# Altium PCB 远程医疗完成2014-11-06.PcbDoc
Units mm, origin at the board's own origin, x right, y up, seen from the top; angles counter-clockwise.
Board outline 50.04 x 93.47 mm, 4 copper layers (Top Layer, Internal Plane 1, Internal Plane 2, Bottom Layer); 67 components, 68 nets, 297 pads, 72 vias.
Unrouted connection lines stored in the file: 1.
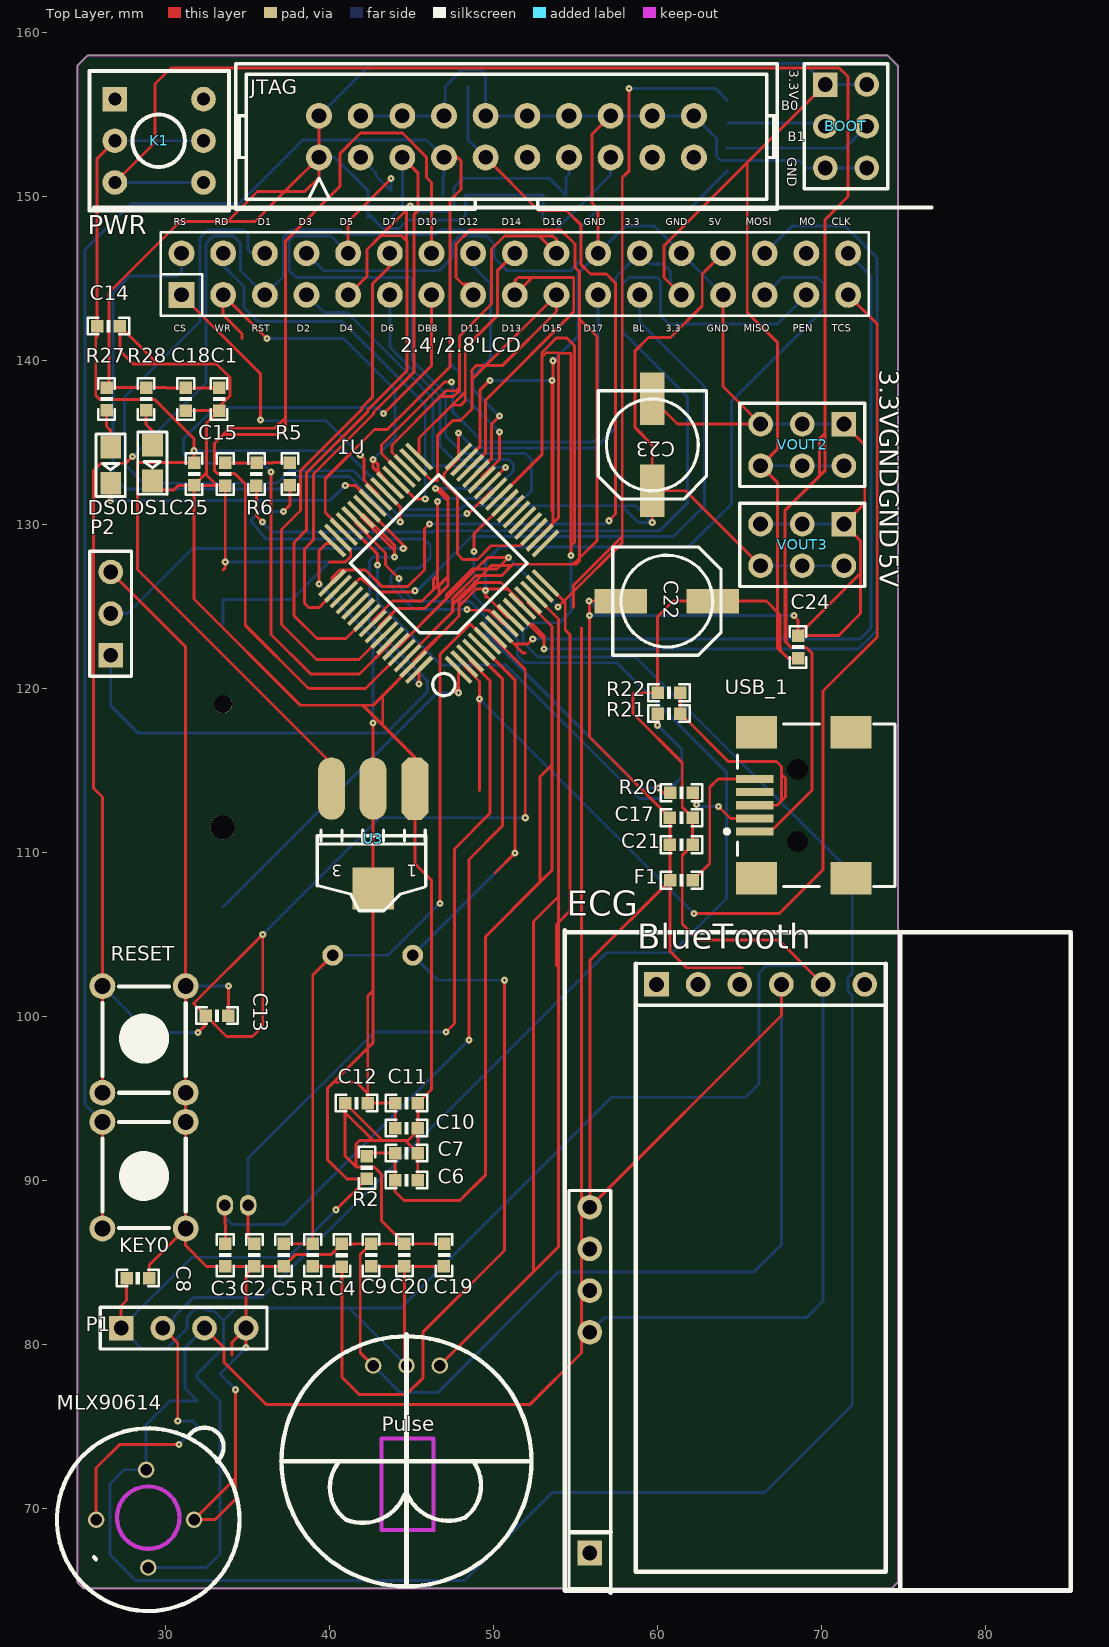
[diagram p0: Top Layer view]
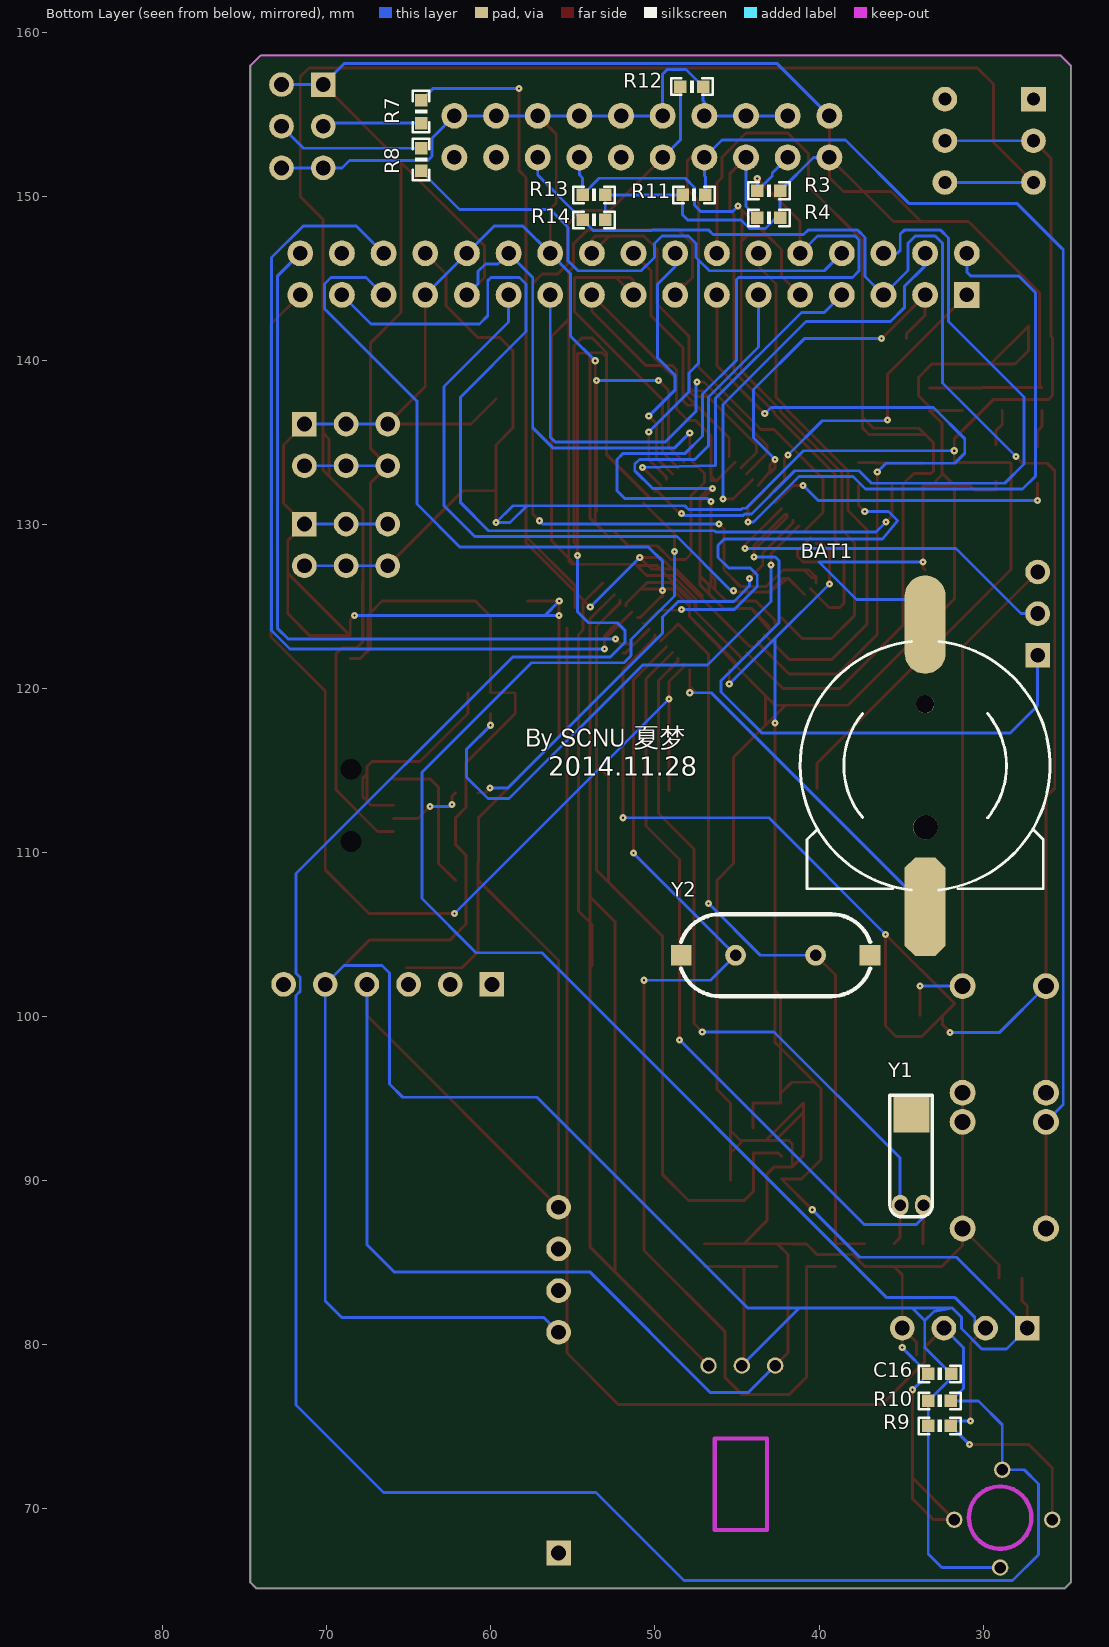
[diagram p1: Bottom Layer view, seen from below]
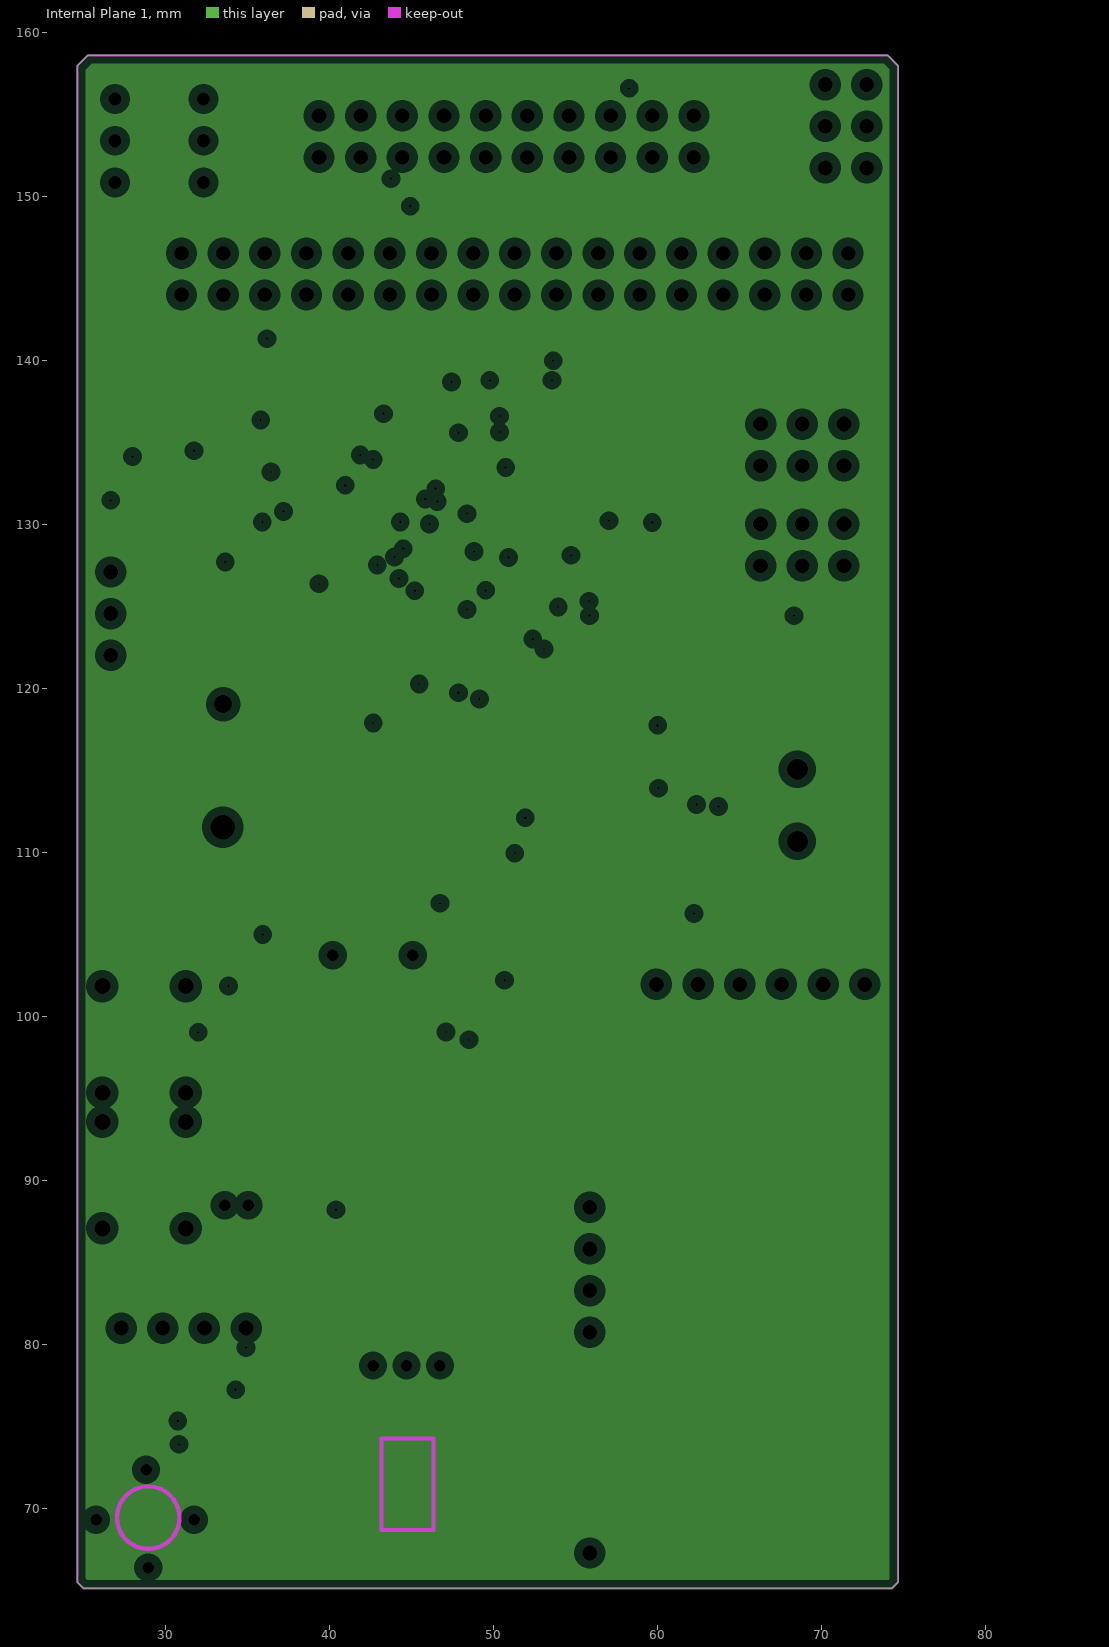
[diagram p2: Internal Plane 1, clearances drawn from the general rule]
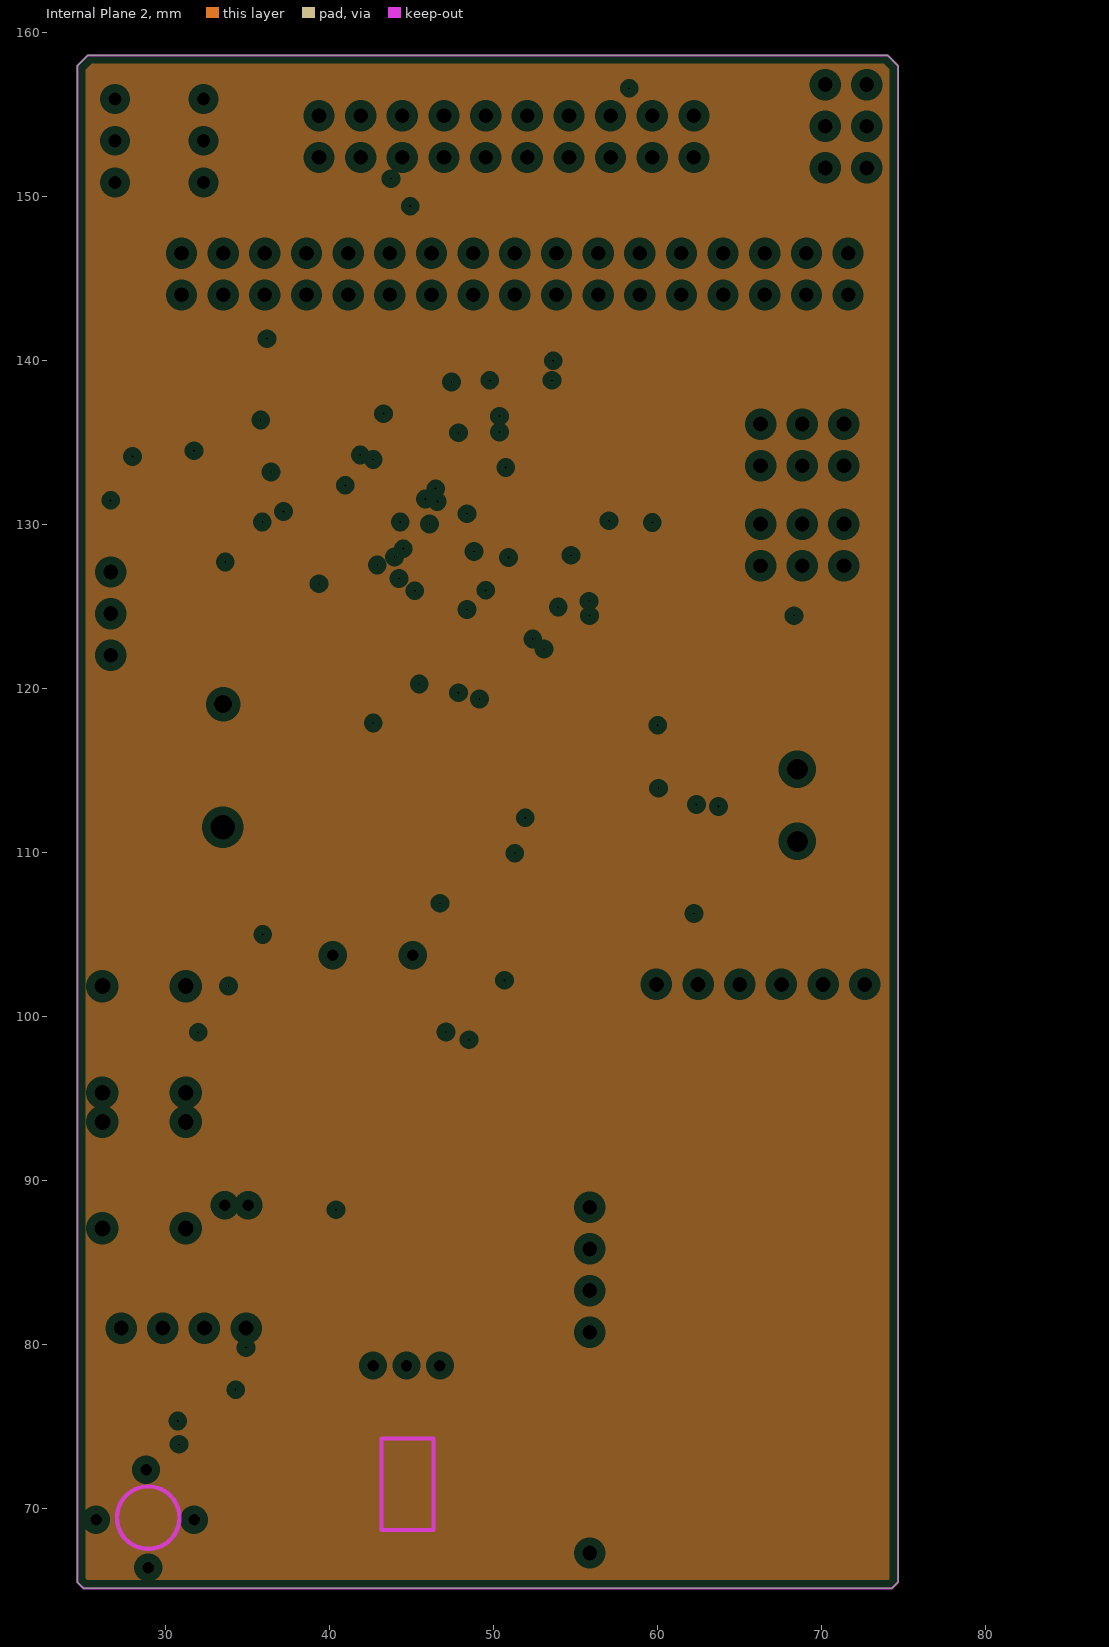
[diagram p3: Internal Plane 2, clearances drawn from the general rule]

## Layer stack, top to bottom
Top Layer: signal copper 0.0356
Dielectric: dielectric 0.32, FR-4, Dk 4.8
Internal Plane 1: plane copper 0.0356
Dielectric: dielectric 0.32, FR-4, Dk 4.8
Internal Plane 2: plane copper 0.0356
Dielectric: dielectric 0.32, FR-4, Dk 4.8
Bottom Layer: signal copper 0.0356

## Board outline
25.019,65.151 24.638,65.532 24.638,157.988 25.273,158.623 74.041,158.623 74.676,157.988 74.676,65.532 74.295,65.151

## Design rules (kind name [scope] priority, off if disabled: settings)
Clearance [All] p1: gap=0.178
HoleSize [All] p1: absolutevalues=TRUE maxlimit=6.3 minlimit=0.3 maxpercent=80.000 minpercent=20.000
HoleToHoleClearance [All] p1 off: gap=0.254 allowstackedmicrovias=FALSE
LayerPairs [All] p1 off: enforce=TRUE
MinimumSolderMaskSliver [All] p1 off: minsoldermaskwidth=0.254
NetAntennae [All] p1 off: netantennaetolerance=0
PlaneClearance [All] p1: clearance=0.508
PlaneConnect [All] p1: planeconnectstyle=Relief reliefexpansion=0.508 reliefentries=4 reliefconductorwidth=0.254 reliefairgap=0.254
PolygonConnect [All] p1: connectstyle=Relief reliefconductorwidth=0.254 reliefentries=4 polygonreliefangle="90 Angle" airgapwidth=0.254
RoomDefinition 远程医疗 [InComponentClass('远程医疗')] p1: confinementstyle=ConfineIn formatcopy=TRUE lockcomponents=FALSE outline 0,0 50.8,0 50.8,25.4 0,25.4
RoutingVias [All] p1: holewidth=0.127 width=0.432 viastyle="Through Hole" minholewidth=0.127 minwidth=0.432 maxholewidth=0.127 maxwidth=0.432
SilkToSilkClearance [All] p1 off: silktosilkclearance=0.1
SilkToSolderMaskClearance [IsPad] p1 off: minsilkscreentomaskgap=0.1 clearancetoexposedcopper=TRUE
SolderMaskExpansion [All] p1: expansion=0.102
Width [All] p1: maxlimit=0.178 minlimit=0.178 preferedwidth=0.178
19 further rules are at their usual default settings.

## Components (designator, comment, footprint, x,y, rotation, side; value= is the part's Value field where it differs from the comment)
2.4'/2.8'LCD "TFT_LCD" DB2*17 56.388,118.618 r0 top
BAT1 "BATT" BATM 33.528,115.316 r180 bottom
BlueTooth "BlueTooth" BlueTooth 59.944,101.981 r0 top
BOOT "VCC5" HDR2X3 70.231,156.845 r270 top
C1 "104" 0603P#1 33.274,137.668 r270 top
C2 "22pF" 0603P#1 35.433,85.471 r90 top
C3 "22pF" 0603P#1 33.655,85.471 r90 top
C4 "22pF" 0603P#1 40.767,85.471 r270 top
C5 "22pF" 0603P#1 37.211,85.471 r90 top
C6 "104" 0603P#1 44.704,90.043 r180 top
C7 "10u" 0603P#1 44.704,91.694 r180 top
C8 "104" 0603P#1 28.321,84.074 r0 top
C9 "104" 0603P#1 42.545,85.471 r90 top
C10 "104" 0603P#1 44.704,93.218 r0 top
C11 "104" 0603P#1 44.704,94.742 r0 top
C12 "104" 0603P#1 41.656,94.742 r180 top
C13 "104" 0603P#1 33.147,100.076 r0 top
C14 "104" 0603P#1 26.543,142.113 r180 top
C15 "22pF" 0603P#1 33.655,133.096 r270 top
C16 "100nF" 0603P#1 32.639,78.232 r180 bottom
C17 "104" 0603P#1 61.468,112.141 r180 top
C18 "104" 0603P#2 31.242,137.668 r270 top
C19 "104" 0603P#1 46.99,85.471 r90 top
C20 "104" 0603P#1 44.577,85.471 r90 top
C21 "10u" 0603P#1 61.468,110.49 r180 top
C22 "220uF" CC6.56.5 60.579,125.349 r180 top
C23 "220uF" CC6.56.5 59.69,134.874 r90 top
C24 "104" 0603P#1 68.58,122.555 r270 top
C25 "104" 0603P#1 31.75,133.096 r90 top
DS0 "LED0" SMDLED 26.67,134.747 r270 top
DS1 "PWR" SMDLED 29.21,134.874 r270 top
ECG "ECG" ECG 83.947,102.997 r270 top
F1 "500mA" 0603P#1 61.468,108.331 r0 top
JTAG "JTAG" JTAG_20 50.8,153.67 r0 top
K1 "BUTTON" BTN8.5*8.5 26.924,155.956 r0 top
KEY0 "KEY_M" KEY_M 31.242,93.599 r270 top
MLX90614 "MLX90614" MLX90614 28.829,72.39 r90 top
P1 "Header 4" HDR1X4 27.305,81.026 r0 top
P2 "Header 3" HDR1X3 26.67,122.047 r90 top
Pulse "Pulse" Pulse 46.736,78.74 r180 top
R1 "1M" 0603P#1 38.989,85.471 r90 top
R2 "10R" 0603P#1 42.291,90.805 r90 top
R3 "10K" 0603P#1 43.053,150.368 r0 bottom
R4 "10K" 0603P#1 43.053,148.717 r0 bottom
R5 "4.7K" 0603P#1 37.592,133.096 r90 top
R6 "10R" 0603P#1 35.56,133.096 r270 top
R7 "100K" 0603P#1 64.262,155.194 r270 bottom
R8 "100K" 0603P#1 64.262,152.273 r270 bottom
R9 "4.7K" 0603P#1 32.639,75.057 r0 bottom
R10 "4.7K" 0603P#1 32.639,76.581 r0 bottom
R11 "10K" 0603P#1 47.625,150.114 r180 bottom
R12 "10K" 0603P#1 47.752,156.718 r0 bottom
R13 "10K" 0603P#1 53.721,150.114 r0 bottom
R14 "10K" 0603P#1 53.721,148.59 r0 bottom
R20 "22R" 0603P#1 61.468,113.665 r0 top
R21 "22R" 0603P#1 60.706,118.491 r0 top
R22 "1.5K" 0603P#1 60.706,119.761 r0 top
R27 "510" 0603P#1 26.416,137.668 r90 top
R28 "510" 0603P#1 28.829,137.668 r90 top
RESET "KEY_M" KEY_M 26.162,95.377 r90 top
U1 "STM32F103RBT6" STM32F103RXT 47.879,121.158 r135 top
U3 "AMS1117-3.3" AMS1117 45.212,113.919 r180 top
USB_1 "USB" USB/SM0.8-6H5 73.787,112.903 r0 top
VOUT2 "VCC3.3" HDR2X3 71.374,136.144 r180 top
VOUT3 "VCC5" HDR2X3 71.374,130.048 r180 top
Y1 "32.768MHz" "XTAL 32M" 35.052,88.519 r90 bottom
Y2 "8MHz" XTAL_US 45.085,103.759 r180 bottom

## Footprints (in the part's own frame and the unit in brackets; to place one, negate y for a bottom-side part, rotate by r counter-clockwise, add the part's x,y. Pads: shape width x height; smd on the part's side, far side on the other; paste and mask are expansions set on the pad)
0603P#1 [mil]
  rect 30x30 smd: 1(-27,0) 2(27.5,-0.06)
  silkscreen extent -50,-20 50,20
0603P#2 [mil]
  rect 30x30 smd: 1(-27,0) 2(27.5,0.06)
  silkscreen extent -50,-20 50,20
AMS1117 [mil]
  oct 65x150 smd: 1(0.03,-0.06)
  oval 65x150 smd: 2(100.03,-0.06) 3(200.03,-0.06)
  rect 100x100 smd: 4(100.03,239.94)
  silkscreen extent -26,100 234,293
BATM [mm]
  round 1.1 hole 1.1 unplated: 0(0,3.748)
  round 1.5 hole 1.5 unplated: 0(0.025,-3.752)
  oct 2.5x6 smd: 1(0,-8.602)
  oval 2.5x6 smd: 2(0,8.598)
  silkscreen extent -7.62,-7.58 7.62,7.57
BlueTooth [mm]
  rect 1.5x1.5 hole 0.9: 1(0,0)
  round 1.5 hole 0.9: 2(2.54,0) 3(5.08,0) 4(7.62,0) 5(10.16,0) 6(12.7,0)
  silkscreen extent -1.27,-35.81 13.97,1.27
BTN8.5*8.5 [mm]
  rect 1.5x1.5 hole 0.8: 1(0,0)
  round 1.5 hole 0.8: 2(0,-2.54) 3(0,-5.08) 4(5.4,-5.08) 5(5.4,-2.54) 6(5.4,0)
  silkscreen extent -1.55,-6.79 6.95,1.71
CC6.56.5 [mm]
  rect 3.2x1.5 smd: 1(-2.794,0) 2(2.8,0)
  silkscreen extent -3.3,-3.3 3.3,3.3
DB2*17 [mil]
  rect 62x62 hole 35: 1(-1000,1000)
  round 62 hole 35: 2(-1000,1100) 3(-900,1000) 4(-900,1100) 5(-800,1000) 6(-800,1100) 7(-700,1000) 8(-700,1100) 9(-600,1000) 10(-600,1100) 11(-500,1000) 12(-500,1100) 13(-400,1000) 14(-400,1100) 15(-300,1000) 16(-300,1100) 17(-200,1000) 18(-200,1100) 19(-100,1000) 20(-100,1100) 21(0,1000) 22(0,1100) 23(100,1000) 24(100,1100) 25(200,1000) 26(200,1100) 27(300,1000) 28(300,1100) 29(400,1000) 30(400,1100) 31(500,1000) 32(500,1100) 33(600,1000) 34(600,1100)
  round 133.86 on Top Overlay: ""(-1080,-1935) ""(675,-1935)
  silkscreen extent -1210,-2035 800,1210
ECG [mm]
  rect 1.5x1.5 hole 0.9: 1(35.687,-28.067)
  round 1.5 hole 0.9: 2(22.225,-28.067) 3(19.685,-28.067) 4(17.145,-28.067) 5(14.605,-28.067)
  silkscreen extent -2.29,-29.59 38.1,1.27
HDR1X3 [mm] "Connector; Header; 3 Position"
  rect 1.5x1.5 hole 0.9: 1(0,0)
  round 1.5 hole 0.9: 2(2.54,0) 3(5.08,0)
  silkscreen extent -1.27,-1.27 6.35,1.27
HDR1X4 [mm] "Connector; Header; 4 Position"
  rect 1.5x1.5 hole 0.9: 1(0,0)
  round 1.5 hole 0.9: 2(2.54,0) 3(5.08,0) 4(7.62,0)
  silkscreen extent -1.27,-1.27 8.89,1.27
HDR2X3 [mm]
  rect 1.5x1.5 hole 0.9: 1(0,0)
  round 1.5 hole 0.9: 2(0,2.54) 3(2.54,0) 4(2.54,2.54) 5(5.08,0) 6(5.08,2.54)
  silkscreen extent -1.27,-1.27 6.35,3.81
JTAG_20 [mil]
  round 62 hole 35: 1(-450,-50) 2(-450,50) 3(-350,-50) 4(-350,50) 5(-250,-50) 6(-250,50) 7(-150,-50) 8(-150,50) 9(-50,-50) 10(-50,50) 11(50,-50) 12(50,50) 13(150,-50) 14(150,50) 15(250,-50) 16(250,50) 17(350,-50) 18(350,50) 19(450,-50) 20(450,50)
  silkscreen extent -650,-175 650,175
KEY_M [mil]
  round 62 hole 38: 1(0,0) 1(255.91,0) 2(0,-200) 2(255.91,-200)
  silkscreen extent 0,-200 255,0
MLX90614 [mm]
  round 1 hole 0.7: 1(0,0) 2(-3.048,3.048) 3(-5.969,-0.127) 4(-3.048,-2.921)
  silkscreen extent -8.62,-5.7 2.56,5.44
Pulse [mm]
  round 1 hole 0.7: 1(0,0) 2(2.032,0) 3(4.064,0)
  silkscreen extent -5.59,-1.9 9.65,13.46
SMDLED [mm]
  rect 1.4x1.27 smd: 1(0.001,-0.002) 2(2.211,-0.002)
  silkscreen extent -0.8,-0.89 3.01,0.89
STM32F103RXT [mm]
  rect 2.2x0.254 smd: 1(0,0) 2(0,-0.5) 3(0,-1) 4(0,-1.5) 5(0,-2) 6(0,-2.5) 7(0,-3) 8(0,-3.5) 9(0,-4) 10(0,-4.5) 11(0,-5) 12(0,-5.5) 13(0,-6) 14(0,-6.5) 15(0,-7) 16(0,-7.5) 33(10.9,-7.5) 34(10.9,-7) 35(10.9,-6.5) 36(10.9,-6) 37(10.9,-5.5) 38(10.9,-5) 39(10.9,-4.5) 40(10.9,-4) 41(10.9,-3.5) 42(10.9,-3) 43(10.9,-2.5) 44(10.9,-2) 45(10.9,-1.5) 46(10.9,-1) 47(10.9,-0.5) 48(10.9,0)
  rect 0.254x2.2 smd: 17(1.7,-9.2) 18(2.2,-9.2) 19(2.7,-9.2) 20(3.2,-9.2) 21(3.7,-9.2) 22(4.2,-9.2) 23(4.7,-9.2) 24(5.2,-9.2) 25(5.7,-9.2) 26(6.2,-9.2) 27(6.7,-9.2) 28(7.2,-9.2) 29(7.7,-9.2) 30(8.2,-9.2) 31(8.7,-9.2) 32(9.2,-9.2) 49(9.2,1.7) 50(8.7,1.7) 51(8.2,1.7) 52(7.7,1.7) 53(7.2,1.7) 54(6.7,1.7) 55(6.2,1.7) 56(5.7,1.7) 57(5.2,1.7) 58(4.7,1.7) 59(4.2,1.7) 60(3.7,1.7) 61(3.2,1.7) 62(2.7,1.7) 63(2.2,1.7) 64(1.7,1.7)
  silkscreen extent -0.68,-7.56 9.26,1.95
USB/SM0.8-6H5 [mm]
  rect 2.3x0.5 smd: 1(-7.85,-1.6) 2(-7.85,-0.8) 3(-7.85,0) 4(-7.85,0.8) 5(-7.85,1.6)
  rect 2.5x2 smd: 6(-7.75,4.45) 7(-1.996,4.45) 8(-7.75,-4.45) 9(-1.996,-4.45)
  round 0.6 hole 1.27 unplated: MH1(-5.25,2.2) MH2(-5.25,-2.2)
  silkscreen extent -9.67,-4.95 0.7,4.95
"XTAL 32M" [mil]
  oval 50x40 hole 28: 1(0,0) 2(0,-56)
  rect 92.13x86 smd: ""(220,-27)
  silkscreen extent -28,-77 264,25
XTAL_US [mil]
  round 50 hole 28: 1(0,0) 2(192.13,0)
  rect 50x50 smd: ""(-130.32,0) ""(322.44,0)
  silkscreen extent -131,-98 323,98

## Part data
BAT1: library part BAT
BOOT VOUT2 VOUT3: library part "Header 3X2", "Header, 3-Pin, Dual row"
C1 C2 C3 C4 C5 C6 C7 C8 C9 C10 C11 C12 C13 C14 C15 C16 C17 C18 C19 C20 C21 C24 C25: library part C
C22 C23: library part CAP
DS0 DS1: library part LED2, "Typical RED, GREEN, YELLOW, AMBER GaAs LED"
F1 R1 R2 R3 R4 R5 R6 R7 R8 R9 R10 R11 R12 R13 R14 R20 R21 R22 R27 R28: library part R
P1: "Header, 4-Pin"
P2: "Header, 3-Pin"
U3: library part AMS1117
USB_1: library part USB5
Y1 Y2: library part XTAL, "Crystal Oscillator"

## Via types
v1: diameter 0.432, hole 0.127, Top Layer to Bottom Layer, 72 vias

## Nets (pads, with @x,y where several pads share a name; then routed paths per layer and width w, separated by ;. In a path a pad name is that pad's centre, name@x,y a point inside that pad or via, vN(x,y) a via of type N, cw(c..) or ccw(c..) an arc to the next point about the centre after c; other vN are vias at no path point)
BOOT0: R7.1 U1.60 | length 63.6
  Top Layer w0.178: U1.60 44.211,122.572 47.13,125.491 ; v1(53.95,124.993) 54.889,125.933 ; 54.864,124.968 54.889,124.993 54.889,125.933 ; v1(58.28,156.616) 58.28,151.589 57.861,151.17 57.861,129.286 ; 47.13,125.491 47.13,125.722 48.711,127.303 48.942,127.303 ; 47.13,125.491 48.942,127.303 ; 48.942,127.303 49.655,128.016 v1(50.927,128.016) 50.214,127.303 48.942,127.303 ; 54.889,125.933 57.861,128.905 57.861,129.286 ; 54.889,125.933 54.889,126.314 57.861,129.286
  Bottom Layer w0.178: v1(50.927,128.016) v1(53.95,124.993) ; v1(58.28,156.616) 63.525,156.616 R7.1
BOOT1: 2.4'/2.8'LCD.8 R8.2 U1.28 | length 47.7
  Top Layer w0.178: U1.28 49.293,132.905 50.379,133.991 v1(50.379,135.661)
  Bottom Layer w0.178: 2.4'/2.8'LCD.8 39.675,145.491 46.685,145.491 47.346,146.152 ; v1(50.379,135.661) 47.93,138.11 47.93,139.266 47.346,139.85 47.346,146.152 ; R8.2 61.914,149.225 56.388,149.225 55.296,148.133 55.296,146.101 54.686,145.491 50.851,145.491 50.038,146.304 50.038,147.155 49.581,147.612 47.955,147.612 47.498,147.155 47.498,146.304 47.346,146.152
"BT RXD": P2.2 U1.42 | length 23.1
  Top Layer w0.178: U1.42 44.504,128.775 ; v1(44.504,128.549) 44.504,128.775 ; v1@44.702,128.549 44.702,128.578 44.504,128.775
  Bottom Layer w0.178: P2.2 27.686,124.587 31.648,128.549 v1(44.504,128.549)
"BT TXD": P2.1 U1.43 | length 41.7
  Top Layer w0.178: v1(43.967,128.041) 43.967,128.067 43.967,128.455 ; 43.967,128.455 41.939,130.483 U1.43 42.09,130.633 43.967,128.755 43.967,128.455
  Bottom Layer w0.178: P2.1 26.67,118.974 28.346,117.297 43.459,117.297 45.974,119.812 45.974,120.498 42.443,124.028 42.443,127.813 42.672,128.041 v1(43.967,128.041)
ECG: U1.16 | length 24.3
  Top Layer w0.178: U1.16 54.381,125.262 54.381,123.596 54.661,123.317 54.661,106.451 53.848,105.639 53.848,103.124
GND: 2.4'/2.8'LCD.22 2.4'/2.8'LCD.26 2.4'/2.8'LCD.27 BAT1.2 BlueTooth.4 BOOT.5 BOOT.6 C1.2 C2.1 C3.1 C4.1 C5.1 C6.1 C7.1 C8.2 C9.2 C10.2 C11.2 C12.2 C13.2 C14.1 C15.2 C16.1 C17.2 C18.2 C19.2 C20.2 C21.2 C22.2 C23.2 C24.1 C25.1 DS1.2 ECG.5 F1.1 JTAG.4 JTAG.6 JTAG.8 JTAG.10 JTAG.12 JTAG.14 JTAG.16 JTAG.18 JTAG.20 KEY0.1 MLX90614.4 P1.4 P2.3 Pulse.3 R12.1 RESET.2 U1.12 U1.18 U1.31 U1.47 U1.63 U3.1 VOUT2.1 VOUT2.3 VOUT2.5 VOUT3.1 VOUT3.3 VOUT3.5 | length 532.9
  Top Layer w0.178: P2.3 31.242,122.555 31.242,101.877 31.242,95.377 31.242,93.599 KEY0.1@31.242,87.099 ; C8.2 29.019,84.876 KEY0.1@31.242,87.099 ; DS1.2 29.208,132.119 30.516,132.119 30.807,132.41 C25.1 ; C18.2 C1.2@33.033,136.969 ; 33.528,127.257 33.653,127.383 v1(33.653,127.731) C15.2 33.147,132.398 ; C13.2 v1(33.846,101.877) ; 34.061,79.375 34.061,80.162 P1.4 ; v1(34.29,77.267) 34.29,71.882 ; v1(34.925,79.832) P1.4 ; 40,127.731 40.97,127.731 41.306,128.067 41.306,128.438 U1.47 ; Pulse.3 41.885,79.527 41.885,85.507 C9.2 ; U1.63@45.121,121.361 U1.63@45.121,121.448 ; C6.1 C7.1 ; C19.2 C20.2 ; U1.31 49.174,134.757 49.174,138.201 v1(49.784,138.811) ; U1.12 51.768,125.197 50.88,126.086 ; U1.18 52.829,129.283 53.645,130.099 ; v1(53.569,138.811) 53.569,130.835 53.645,130.759 ; v1(53.645,140.005) 53.645,130.759 ; 53.975,140.335 53.975,130.429 53.645,130.099 ; 2.4'/2.8'LCD.22 56.388,149.25 56.02,149.619 56.02,153.81 JTAG.16 ; C22.2 v1(55.836,125.349) 55.855,125.33 v1(55.855,124.46) 55.855,117.058 C17.2 C21.2 60.77,109.41 60.782,109.398 F1.1 ; C23.2 61.22,136.144 VOUT2.5 64.008,138.43 2.4'/2.8'LCD.27 ; 65.151,102.997 61.773,102.997 60.782,103.988 F1.1 ; BlueTooth.4 67.564,100.076 ECG.5 55.88,103.429 F1.1 ; v1(68.326,124.46) 68.58,124.206 C24.1 ; VOUT2.1 72.644,134.874 72.644,131.318 VOUT3.1 72.391,129.031 72.391,127.052 ; 29.54,139.802 33.122,139.802 33.934,138.989 33.934,137.871 C1.2@33.033,136.969 ; 29.54,139.802 C14.1 27.229,140.614 28.042,139.802 29.54,139.802 ; KEY0.1@31.242,87.099 31.242,86.055 32.512,84.785 C3.1 C2.1 ; C25.1 32.703,132.398 33.147,132.398 ; C25.1 31.75,125.476 38.227,118.999 42.037,118.999 ; C25.1 32.512,133.172 ; 32.512,133.172 32.512,133.032 33.147,132.398 ; 32.512,133.172 32.512,136.209 C1.2 C1.2@33.033,136.969 ; 34.29,71.882 MLX90614.4 33.02,69.342 34.29,70.612 34.29,71.882 ; P1.4 34.925,84.277 C2.1 ; C2.1 C5.1 37.948,85.522 40.132,85.522 C4.1 41.631,86.157 41.643,86.169 C9.2 ; 40.957,94.17 42.672,92.456 ; 40.957,94.17 40.957,91.529 41.631,90.856 ; 40.957,94.17 C12.2 43.245,92.456 ; 41.631,90.856 42.723,90.856 43.18,90.399 43.18,87.568 C20.2 ; 41.631,90.856 41.631,92.253 41.834,92.456 42.672,92.456 ; 42.037,118.999 42.672,118.999 43.257,119.584 ; 42.037,118.999 43.257,117.779 ; C9.2 C20.2 ; 42.672,92.456 43.245,92.456 ; 43.245,92.456 44.628,92.456 ; 43.257,117.779 43.257,119.584 ; 43.257,117.779 45.211,115.825 U3.1 45.211,109.347 46.228,108.33 46.228,95.566 C11.2 C10.2 C10.2@45.402,93.066 ; 43.257,119.584 U1.63@45.121,121.448 ; 44.628,92.456 C7.1 ; 44.628,92.456 44.793,92.456 C10.2@45.402,93.066 ; U1.63@45.121,121.448 U1.63 ; U1.63 45.121,121.662 47.904,124.445 ; U1.63 47.904,124.445 ; C7.1 45.39,92.431 45.402,92.443 ; C7.1 45.402,92.443 ; 45.402,92.443 C10.2@45.402,93.066 ; 47.904,124.445 47.904,125.041 ; 47.904,125.041 48.949,126.086 50.88,126.086 ; 47.904,125.041 47.904,125.349 49.047,126.492 50.473,126.492 50.88,126.086 ; 53.645,130.099 53.645,130.759 ; C24.1 71.044,123.241 72.391,124.588 72.391,127.052 ; C24.1 72.391,127.052
  Bottom Layer w0.178: RESET.2@31.242,101.877 v1(33.846,101.877) ; BAT1.2 33.528,125.451 37.719,125.451 40,127.731 v1(33.653,127.731) ; v1(34.29,77.267) C16.1 v1(34.925,79.832) ; JTAG.4 JTAG.6 JTAG.8 46.99,155.778 47.066,155.854 R12.1 48.108,157.759 49.251,157.759 49.53,157.48 JTAG.10 JTAG.12 JTAG.14 JTAG.16 JTAG.18 JTAG.20 63.602,153.568 63.602,152.476 63.856,152.222 68.631,152.222 69.088,151.765 BOOT.5 BOOT.6 ; Pulse.3 44.323,77.089 46.609,77.089 53.975,84.455 65.913,84.455 67.564,86.106 BlueTooth.4 ; v1(49.784,138.811) v1(53.569,138.811) ; v1(53.645,140.005) 55.143,141.503 55.143,145.313 2.4'/2.8'LCD.22 58.039,148.209 59.817,148.209 2.4'/2.8'LCD.26 2.4'/2.8'LCD.27 ; v1(55.836,125.349) 56.725,124.46 ; v1(55.855,124.46) 56.725,124.46 ; VOUT3.5 VOUT3.3 VOUT3.1 ; VOUT2.5 VOUT2.3 VOUT2.1 ; v1(68.326,124.46) 56.725,124.46
JTCK: JTAG.9 R12.2 U1.49 | length 53.8
  Top Layer w0.178: U1.49 40.172,126.797 ; v1(46.101,130.048) 45.796,129.743 45.796,127.251 44.797,126.251 43.192,126.251 42.201,127.242 U1.49@40.907,127.242 ; JTAG.9 52.756,149.174 54.458,149.174 55.334,148.298 55.334,145.885 55.931,145.288 56.896,145.288 57.455,144.729 57.455,130.658 v1(57.048,130.251) ; 40.172,126.797 40.617,127.242 U1.49@40.907,127.242 ; 40.172,126.797 40.462,126.797 U1.49@40.907,127.242
  Bottom Layer w0.178: v1(46.101,130.048) 56.845,130.048 v1(57.048,130.251) ; R12.2 48.45,153.48 JTAG.9
JTDI: JTAG.5 R4.2 U1.50 | length 37
  Top Layer w0.178: U1.50 39.385,124.968 38.735,124.968 38.478,125.225 38.478,128.535 39.037,129.094 39.037,133.093 42.697,136.753 42.697,136.852 45.174,139.328 45.174,148.934 45.415,149.175 45.415,151.435 JTAG.5
  Bottom Layer w0.178: R4.2 44.45,149.417 JTAG.5
JTDO: 2.4'/2.8'LCD.9 JTAG.13 R13.2 U1.55 | length 55.7
  Top Layer w0.178: 2.4'/2.8'LCD.9 42.291,145.161 42.291,146.787 43.129,147.625 ; U1.55 41.016,123.063 39.243,123.063 37.846,124.46 37.846,128.93 38.595,129.68 38.595,133.154 42.342,136.901 42.342,136.999 44.742,139.399 44.742,147.282 44.704,147.32 ; v1(44.933,149.428) 44.704,149.2 ; 43.129,147.625 44.399,147.625 44.704,147.32 ; 43.129,147.625 44.704,149.2 ; 44.704,147.32 44.704,149.2
  Bottom Layer w0.178: v1(44.933,149.428) 45.263,149.098 47.208,149.098 47.6,149.49 47.6,150.571 48.158,151.13 53.405,151.13 R13.2 54.419,151.155 54.61,151.346 JTAG.13
JTMS: JTAG.7 KEY0.2 R11.2 U1.46 | length 115.6
  Top Layer w0.178: KEY0.2@26.162,87.099 KEY0.2@26.162,93.599 ; U1.46 40.879,129.632 39.751,130.759 39.751,132.811 42.746,135.806 43.528,135.806 47.346,139.624 47.346,149.758 48.031,150.444 48.031,152.197 47.828,152.4 JTAG.7
  Bottom Layer w0.178: KEY0.2@26.162,93.599 25.108,94.653 25.108,146.774 27.915,149.581 34.493,149.581 38.379,153.467 45.923,153.467 JTAG.7 46.99,151.27 46.926,151.206 R11.2
JTRST: 2.4'/2.8'LCD.10 JTAG.3 R3.2 U1.56 | length 58.3
  Top Layer w0.178: 2.4'/2.8'LCD.10 41.148,148.488 v1(43.764,151.105) ; v1(46.584,131.42) 46.584,126.914 ; U1.56@42.687,124.177 42.687,123.986 U1.56 42.646,124.137 U1.56@42.687,124.177 ; U1.56@42.687,124.177 43.859,125.349 45.658,125.349 46.34,126.031 ; 46.34,126.031 46.34,126.67 46.584,126.914 ; 46.34,126.031 46.584,126.275 46.584,126.914
  Bottom Layer w0.178: 2.4'/2.8'LCD.10 40.094,147.612 37.795,147.612 37.554,147.371 37.554,145.491 37.96,145.085 44.907,145.085 45.034,144.958 45.034,140.036 47.099,137.971 47.099,135.425 48.184,134.341 51.968,134.341 52.324,133.985 52.324,132.08 51.841,131.597 46.761,131.597 v1(46.584,131.42) ; JTAG.3 42.85,151.46 42.85,151.271 R3.2 43.752,151.092 v1(43.764,151.105)
"LCD BL": 2.4'/2.8'LCD.23 U1.51 | length 40.9
  Top Layer w0.178: U1.51 41.87,126.746 ; v1(45.212,125.984) 45.123,125.895 43.045,125.895 ; 41.87,126.746 42.194,126.746 43.045,125.895 ; 41.87,126.746 43.045,125.895
  Bottom Layer w0.178: v1(45.212,125.984) 45.364,125.984 48.666,129.286 60.985,129.286 62.865,131.166 62.865,138.43 58.928,142.367 2.4'/2.8'LCD.23
"LCD CS": 2.4'/2.8'LCD.1 U1.40 | length 19.6
  Top Layer w0.178: 2.4'/2.8'LCD.1 35.814,139.192 v1(35.814,136.398) ; v1(41.886,134.263) 42.115,134.034 42.115,132.729 43,131.844 U1.40
  Bottom Layer w0.178: v1(35.814,136.398) 35.865,136.347 39.802,136.347 v1(41.886,134.263)
"LCD D0": 2.4'/2.8'LCD.6 U1.26 | length 46
  Top Layer w0.178: v1(48.387,130.683) 48.486,130.683 49.85,132.047 U1.26
  Bottom Layer w0.178: 2.4'/2.8'LCD.6 35.23,146.558 35.047,146.741 35.047,147.726 34.806,147.968 32.581,147.968 32.106,147.493 32.106,142.392 27.508,137.795 27.508,133.706 28.677,132.537 36.805,132.537 37.567,133.299 41.482,133.299 44.123,130.658 44.523,130.658 44.599,130.581 48.285,130.581 v1(48.387,130.683)
"LCD D1": 2.4'/2.8'LCD.7 U1.27 | length 20.4
  Top Layer w0.178: U1.27 v1(50.749,133.502)
  Bottom Layer w0.178: 2.4'/2.8'LCD.7 39.675,142.951 41.072,142.951 46.323,137.7 46.323,133.611 v1(50.749,133.502)
"LCD D5": 2.4'/2.8'LCD.11 U1.57 | length 36.9
  Top Layer w0.178: U1.57 U1.57@43.04,123.633 ; U1.57@43.04,123.633 44.127,124.91 ; U1.57@43.04,123.633 43.04,123.823 44.127,124.91 ; 44.127,124.91 45.84,124.91 46.695,125.765 ; 46.695,125.765 46.695,126.314 47.244,126.863 ; 46.695,125.765 47.244,126.314 47.244,126.863 ; 47.244,126.863 47.244,131.445 ; 47.244,131.445 v1(46.482,132.207) 46.736,132.207 47.244,131.699 47.244,131.445
  Bottom Layer w0.178: 2.4'/2.8'LCD.11 43.688,140.843 46.744,137.787 46.744,134.823 47.582,133.985 50.949,133.985 51.232,133.702 51.232,133.303 50.136,132.207 v1(46.482,132.207)
"LCD D6": 2.4'/2.8'LCD.12 U1.58 | length 33.1
  Top Layer w0.178: U1.58 43.295,123.279 41.808,121.793 39.218,121.793 37.084,123.927 37.084,129.718 38.24,130.874 38.24,133.301 41.986,137.048 41.986,137.146 42.621,137.781 42.621,144.678 43.688,145.745 2.4'/2.8'LCD.12
"LCD D7": 2.4'/2.8'LCD.13 U1.59 | length 47.4
  Top Layer w0.178: v1(36.449,133.223) 36.449,123.317 38.862,120.904 41.836,120.904 43.707,122.776 U1.59 ; v1(43.307,136.779) 46.228,139.7 2.4'/2.8'LCD.13
  Bottom Layer w0.178: v1(36.449,133.223) 35.916,133.756 31.725,133.756 31.115,134.366 31.115,135.255 33.02,137.16 42.926,137.16 v1(43.307,136.779)
"LCD D8": 2.4'/2.8'LCD.14 U1.61 | length 64
  Top Layer w0.178: U1.61 42.211,120.015 38.735,120.015 34.874,123.876 34.874,132.486 34.227,133.134 33.164,133.134 33.007,133.29 33.007,134.988 33.528,135.509 ; 2.4'/2.8'LCD.14 46.228,150.876 45.923,151.181 45.923,152.418 44.455,153.886 41.905,153.886 40.64,152.621 40.64,150.622 37.338,147.32 37.338,136.55 ; 33.528,135.509 36.957,135.509 37.338,135.89 37.338,136.55 ; 33.528,135.509 33.909,135.89 36.678,135.89 37.338,136.55
"LCD D9": 2.4'/2.8'LCD.15 U1.62 | length 67.3
  Top Layer w0.178: U1.62 44.768,121.95 47.498,124.68 ; 47.498,124.68 47.498,125.469 48.946,126.917 49.278,126.917 ; 47.498,124.68 47.549,124.731 47.549,125.188 49.278,126.917 ; 47.714,145.085 48.12,144.678 48.768,144.678 2.4'/2.8'LCD.15 47.714,145.072 47.714,145.085 ; 47.714,145.085 47.714,147.117 48.565,147.968 54.127,147.968 54.978,147.117 54.978,145.707 55.258,145.428 55.258,142.532 ; 49.278,126.917 49.894,127.533 51.127,127.533 ; 49.278,126.917 50.511,126.917 51.127,127.533 ; 51.127,127.533 51.189,127.596 54.872,127.596 ; 54.872,127.596 55.04,127.596 55.258,127.813 55.258,127.981 ; 54.872,127.596 55.258,127.981 ; 55.258,127.981 56.312,129.035 56.312,141.478 55.258,142.532 ; 55.258,127.981 55.258,142.532
"LCD D10": 2.4'/2.8'LCD.16 U1.29 | length 15.6
  Top Layer w0.178: U1.29 49.897,134.065 49.897,136.143 v1(50.379,136.626)
  Bottom Layer w0.178: 2.4'/2.8'LCD.16 48.768,145.745 49.835,144.678 49.835,140.168 48.768,139.101 48.768,138.237 v1(50.379,136.626)
"LCD D11": 2.4'/2.8'LCD.17 U1.30 | length 20.3
  Top Layer w0.178: U1.30 49.53,134.405 49.53,137.617 54.902,142.989 54.902,145.059 54.877,145.085 52.375,145.085 ; 52.375,145.085 2.4'/2.8'LCD.17 51.308,144.882 51.511,145.085 52.375,145.085
"LCD D12": 2.4'/2.8'LCD.18 U1.33 | length 16.3
  Top Layer w0.178: U1.33 45.475,135.29 47.479,137.294 ; 2.4'/2.8'LCD.18 50.241,145.491 50.241,142.748 48.285,140.792 48.285,138.101 ; 47.479,137.294 48.013,137.294 48.285,137.566 48.285,138.101 ; 47.479,137.294 48.285,138.101
"LCD D13": 2.4'/2.8'LCD.19 U1.34 | length 25.5
  Top Layer w0.178: U1.34 46.265,132.672 46.282,132.69 ; 46.282,132.69 46.584,132.69 46.584,132.991 ; 46.282,132.69 46.584,132.991 ; 46.584,132.991 46.584,133.345 ; 46.584,133.345 46.609,133.37 46.609,133.591 46.584,133.617 ; 46.584,133.345 46.584,133.617 ; 46.584,133.617 46.584,135.433 47.521,136.371 47.993,136.371 48.692,137.069 48.692,138.862 ; 48.692,138.862 48.692,139.446 48.971,139.725 49.555,139.725 ; 48.692,138.862 49.555,139.725 ; 49.555,139.725 50.571,139.725 53.848,143.002 2.4'/2.8'LCD.19 49.555,139.725
"LCD D14": 2.4'/2.8'LCD.20 U1.35 | length 24.9
  Top Layer w0.178: U1.35 43.815,134.414 43.815,134.874 46.761,137.82 ; 46.761,137.82 47.574,137.82 47.93,138.176 47.93,138.379 ; 46.761,137.82 47.117,138.176 47.727,138.176 47.93,138.379 ; 47.93,138.379 47.93,141.503 49.886,143.459 49.886,146.812 50.686,147.612 52.794,147.612 ; 52.794,147.612 2.4'/2.8'LCD.20 53.848,147.409 53.645,147.612 52.794,147.612
"LCD D15": 2.4'/2.8'LCD.21 U1.36 | length 28.4
  Top Layer w0.178: U1.36 43.18,134.342 43.18,134.874 47.015,138.709 v1(47.447,138.709)
  Bottom Layer w0.178: v1(47.447,138.709) 47.498,138.659 47.498,136.922 49.369,135.052 56.083,135.052 56.388,135.357 2.4'/2.8'LCD.21
"LCD RD": 2.4'/2.8'LCD.4 U1.37 | length 25.4
  Top Layer w0.178: U1.37 45.243,131.572 v1(45.847,131.572)
  Bottom Layer w0.178: 2.4'/2.8'LCD.4 33.528,145.796 34.798,144.526 34.798,143.231 35.636,142.392 40.792,142.392 45.847,137.338 v1(45.847,131.572)
"LCD RS": 2.4'/2.8'LCD.2 U1.39 | length 38.6
  Top Layer w0.178: U1.39 44.323,131.078 v1(44.323,130.175)
  Bottom Layer w0.178: 2.4'/2.8'LCD.2 30.988,145.415 30.734,145.161 27.813,145.161 26.797,144.145 26.797,132.969 27.584,132.182 37.16,132.182 37.922,132.944 41.221,132.944 43.989,130.175 v1(44.323,130.175)
"LCD WR": 2.4'/2.8'LCD.3 U1.38 | length 23.7
  Top Layer w0.178: 34.671,141.351 34.671,141.656 33.528,142.799 2.4'/2.8'LCD.3 v1(36.195,141.351) ; U1.38@42.977,133.172 42.672,133.477 v1(42.672,133.985) 42.977,133.68 42.977,133.284 U1.38
  Bottom Layer w0.178: v1(36.195,141.351) 40.894,141.351 43.993,138.252 43.993,135.306 v1(42.672,133.985)
LED0: DS0.2 U1.41 | length 17.9
  Top Layer w0.178: v1(26.668,131.496) DS0.2 ; v1(40.97,132.41) v1@41.072,132.41 ; v1@41.021,132.461 v1@41.072,132.41 ; U1.41 41.577,132.41 v1@41.072,132.41
  Bottom Layer w0.178: v1(26.668,131.496) 40.056,131.496 v1(40.97,132.41)
Net2.4'/2.8'LCD_31: 2.4'/2.8'LCD.31 R6.2 | length 58.8
  Top Layer w0.178: R6.2 35.558,130.531 v1(35.914,130.175)
  Bottom Layer w0.178: v1(35.914,130.175) 36.524,129.565 46.301,129.565 46.377,129.642 60.147,129.642 61.849,131.343 61.849,137.795 57.861,141.783 57.861,144.678 58.268,145.085 59.995,145.085 60.198,144.882 60.198,142.748 60.706,142.24 67.31,142.24 2.4'/2.8'LCD.31
NetBAT1_1: BAT1.1 U1.1 | length 21.7
  Top Layer w0.178: 47.498,119.761 47.879,120.142 ; v1(47.879,119.761) 47.879,120.142 ; U1.1 47.879,120.142
  Bottom Layer w0.178: BAT1.1 46.575,119.761 v1(47.879,119.761)
NetBOOT_3: BOOT.3 R7.2 | length 6
  Bottom Layer w0.178: R7.2 70.04,154.495 BOOT.3
NetBOOT_4: BOOT.4 R8.1 | length 9.1
  Bottom Layer w0.178: R8.1 71.425,152.959 BOOT.4
NetC2_2: C2.2 U1.3 Y1.1 | length 45
  Top Layer w0.178: Y1.1 35.052,86.552 C2.2 ; v1(47.117,99.085) 47.625,99.593 47.625,110.236 49.784,112.395 49.784,120.517 48.586,121.715 U1.3
  Bottom Layer w0.178: Y1.1 35.052,91.389 42.748,99.085 v1(47.117,99.085)
NetC3_2: C3.2 U1.4 Y1.2 | length 48.1
  Top Layer w0.178: Y1.2 33.63,87.352 33.657,87.325 C3.2 ; v1@48.514,98.425 v1(48.514,98.603) 48.514,109.601 50.546,111.633 50.546,120.612 U1.4
  Bottom Layer w0.178: Y1.2 33.63,87.782 34.061,87.351 37.262,87.351 v1(48.514,98.603)
NetC4_2: C4.2 R1.1 U1.5 Y2.1 | length 70.8
  Top Layer w0.178: R1.1 39.853,84.785 39.865,84.772 C4.2 40.765,78.029 41.807,76.987 44.704,76.987 45.72,78.003 45.72,80.797 50.673,85.75 v1(50.673,102.235) ; U1.5 51.308,120.557 v1(51.308,109.982) 50.102,108.775
  Bottom Layer w0.178: v1(50.673,102.235) 46.609,102.235 Y2.1 v1(51.308,109.982)
NetC5_2: C5.2 R1.2 U1.6 Y2.2 | length 47
  Top Layer w0.178: C5.2 R1.2 38.991,102.545 Y2.2 ; v1(46.745,106.925) 46.745,122.111 48.586,123.952 U1.6
  Bottom Layer w0.178: Y2.2 43.578,103.759 v1(46.745,106.925)
NetC6_2: C6.2 C7.2 R2.2 U1.13 | length 55.3
  Top Layer w0.178: R2.2 42.485,91.696 C7.2 C6.2 44.005,89.344 44.552,88.798 47.955,88.798 49.53,90.373 49.53,104.902 52.832,108.204 ; U1.13 52.122,125.25 53.569,123.803 53.569,115.37 ; 52.832,108.204 52.832,114.634 53.569,115.37 ; 52.832,108.204 53.569,108.941 53.569,115.37
NetC15_1: C15.1 R5.2 R6.1 | length 3.9
  Top Layer w0.178: C15.1 R6.1 36.551,133.782 36.563,133.794 R5.2
NetDS0_1: DS0.1 R27.1 | length 2.3
  Top Layer w0.178: R27.1 26.416,135.99 26.668,135.738 DS0.1
NetDS1_1: DS1.1 R28.1 | length 2.3
  Top Layer w0.178: R28.1 28.829,136.117 29.208,135.738 DS1.1
NetF1_2: F1.2 USB_1.5 | length 9
  Top Layer w0.178: F1.2 63.195,109.358 63.195,113.995 63.703,114.503 USB_1.5
NetK1_3: K1.3 K1.4 USB_1.1 | length 112.7
  Top Layer w0.178: K1.3 29.362,153.314 29.362,156.87 30.354,157.862 71.094,157.862 71.628,157.328 71.628,150.012 70.231,148.615 70.231,135.585 ; USB_1.1 66.914,111.303 69.439,113.828 69.439,122.153 69.088,122.504 68.177,122.504 67.843,122.838 ; 67.793,126.568 67.793,130.886 69.875,132.969 ; 67.793,126.568 67.843,126.517 67.843,122.838 ; 67.793,126.568 67.793,122.889 67.843,122.838 ; 69.875,132.969 69.875,135.23 70.231,135.585 ; 69.875,132.969 70.231,133.325 70.231,135.585
  Bottom Layer w0.178: K1.3 K1.4
NetR20_2: R20.2 USB_1.2 | length 4.7
  Top Layer w0.178: R20.2 62.382,113.447 v1(62.382,112.954) ; v1(63.729,112.827) 64.452,112.103 USB_1.2
  Bottom Layer w0.178: v1(62.382,112.954) 62.509,112.827 v1(63.729,112.827)
NetR21_2: R21.2 R22.2 USB_1.3 | length 14.5
  Top Layer w0.178: R22.2 R21.2 64.324,115.57 67.262,115.57 67.564,115.268 67.564,114.808 ; USB_1.3 67.31,112.903 67.564,113.157 ; 67.564,113.157 67.818,113.411 67.818,114.554 67.564,114.808 ; 67.564,113.157 67.564,114.808
PA0: Pulse.1 U1.14 | length 74.2
  Top Layer w0.178: Pulse.1 52.451,84.455 ; U1.14 53.975,124.254 53.975,107.342 ; 52.451,84.455 52.451,105.818 53.975,107.342 ; 52.451,84.455 53.975,85.979 53.975,107.342
PA1: U1.15
PA3: U1.17
PA4: U1.20
PA5: U1.21
PA6: U1.22
PA7: U1.23
PA11: R20.1 U1.44 | length 27.7
  Top Layer w0.178: U1.44 41.586,130.129 43.428,128.287 43.428,127.552 v1(44.247,126.734) ; 59.792,113.944 v1(60.071,113.944) 60.35,113.665 R20.1
  Bottom Layer w0.178: v1(44.247,126.734) 44.247,126.267 45.19,125.324 48.587,125.324 49.538,124.373 49.538,123.394 58.987,113.944 v1(60.071,113.944)
PA12: R21.1 U1.45 | length 33.9
  Top Layer w0.178: U1.45 42.926,128.232 v1(42.926,127.559) ; v1(60.02,117.78) R21.1
  Bottom Layer w0.178: v1(42.926,127.559) 42.926,125.329 46.794,121.461 50.751,121.461 58.903,113.309 60.189,113.309 61.484,114.605 61.484,116.316 v1(60.02,117.78)
PC0: 2.4'/2.8'LCD.34 U1.8 | length 47.8
  Top Layer w0.178: U1.8 51.254,122.733 ; 51.943,122.174 51.813,122.174 51.254,122.733 ; v1(52.4,123.038) 52.095,122.733 51.254,122.733
  Bottom Layer w0.178: v1(52.4,123.038) 72.365,123.038 73.025,123.698 73.025,145.161 2.4'/2.8'LCD.34
PC1: R5.1 U1.9 | length 27.8
  Top Layer w0.178: v1(37.211,130.81) 37.592,131.191 R5.1 ; v1(48.387,124.841) 48.438,124.79 49.753,124.79 50.557,123.986 U1.9
  Bottom Layer w0.178: v1(37.211,130.81) 35.763,130.81 35.209,130.256 36.129,129.129 45.776,129.129 46.152,128.753 46.152,128.016 45.517,127.381 44.212,127.381 43.764,126.934 43.764,126.246 45.17,124.841 v1(48.387,124.841)
PC2: 2.4'/2.8'LCD.29 U1.10 | length 40.7
  Top Layer w0.178: 49.53,125.603 49.648,125.603 ; v1(49.53,126.009) 49.53,125.721 49.648,125.603 ; U1.10 50.911,124.34 49.648,125.603
  Bottom Layer w0.178: v1(49.53,126.009) 49.53,127.776 50.394,128.639 61.888,128.639 64.516,131.267 64.516,137.541 70.155,143.18 70.155,144.678 69.748,145.085 67.615,145.085 2.4'/2.8'LCD.29
PC3: 2.4'/2.8'LCD.30 U1.11 | length 56.2
  Top Layer w0.178: U1.11 U1.11@52.181,123.927 ; v1(53.086,122.428) 53.086,123.022 ; U1.11@52.181,123.927 52.42,123.927 53.086,123.261 53.086,123.022 ; U1.11@52.181,123.927 53.086,123.022
  Bottom Layer w0.178: v1(53.086,122.428) 72.258,122.428 73.381,123.551 73.381,146.296 71.468,148.209 68.199,148.209 2.4'/2.8'LCD.30
PC4: MLX90614.2 P1.2 R9.1 U1.24 | length 97.9
  Top Layer w0.178: MLX90614.2 25.781,72.492 27.229,73.939 v1(30.836,73.939) ; P1.2 30.759,80.112 v1(30.759,75.354) ; v1(48.819,128.372) 48.819,129.452 U1.24
  Bottom Layer w0.178: P1.2 30.505,81.026 30.505,81.686 31.699,82.88 35.865,82.88 56.896,103.911 60.909,103.911 64.211,107.213 64.211,114.91 57.531,121.59 51.892,121.59 51.46,122.022 51.46,123.012 48.819,125.654 v1(48.819,128.372) ; v1(30.759,75.354) 31.656,75.354 R9.1 v1(30.836,73.939)
PC5: MLX90614.1 P1.3 R10.1 U1.25 | length 248.6
  Top Layer w0.178: P1.3 33.579,79.832 33.579,78.943 36.144,76.378 52.248,76.378 55.372,79.502 55.372,123.698 ; v1(54.737,128.143) 54.737,128.727 ; 52.959,134.299 U1.25 50.394,131.694 52.959,134.259 52.959,134.299 ; 52.959,134.299 52.959,140.233 ; 52.959,140.233 53.238,140.513 54.737,140.437 54.737,128.727 ; 52.959,140.233 52.959,140.513 53.848,141.402 54.458,141.402 54.94,140.919 54.94,128.93 54.737,128.727
  Bottom Layer w0.178: P1.3 31.191,79.832 31.191,77.343 R10.1 30.277,76.581 28.829,75.133 MLX90614.1 27.483,72.39 26.619,71.526 26.619,67.208 28.194,65.634 48.235,65.634 53.594,70.993 66.548,70.993 71.882,76.327 71.882,101.305 71.627,101.56 71.627,102.402 71.882,102.657 71.882,108.737 58.674,121.945 52.73,121.945 51.816,122.86 51.816,123.546 52.299,124.028 54.051,124.028 54.737,124.714 v1(54.737,128.143)
PC11: U1.52
PC12: U1.53
PC13: 2.4'/2.8'LCD.33 U1.2 | length 72.7
  Top Layer w0.178: U1.2 48.233,121.361 49.149,120.445 v1(49.149,119.38) 49.149,113.792 ; v1(62.23,106.299) 67.437,106.299 70.104,108.966 70.104,119.863 73.406,123.165 73.406,142.24 2.4'/2.8'LCD.33
  Bottom Layer w0.178: v1(49.149,119.38) v1(62.23,106.299)
PD2: U1.54
RESET: 2.4'/2.8'LCD.5 C13.1 JTAG.15 R14.2 RESET.1 U1.7 | length 144.8
  Top Layer w0.178: RESET.1@26.162,95.377 26.162,101.877 26.162,113.411 25.629,113.944 25.629,133.299 26.086,133.756 27.584,133.756 v1(27.991,134.163) ; v1(32.004,99.06) 32.461,99.517 C13.1 ; U1.7 50,123.129 51.943,121.186 v1(51.943,112.141) ; C13.1 33.731,98.806 35.306,98.806 35.941,99.441 v1(35.941,105.029) 31.725,100.813 C13.1
  Bottom Layer w0.178: RESET.1@26.162,101.877 28.979,99.06 v1(32.004,99.06) ; v1(27.991,134.163) 32.474,138.646 32.474,147.168 32.918,147.612 34.138,147.612 34.582,147.168 34.582,145.504 2.4'/2.8'LCD.5 37.198,145.148 37.198,147.523 37.643,147.968 40.674,147.968 40.941,147.701 46.457,147.701 46.723,147.968 50.178,147.968 50.203,147.942 53.77,147.942 R14.2 57.15,151.322 JTAG.15 ; v1(35.941,105.029) 43.053,112.141 v1(51.943,112.141)
VCC3.3: 2.4'/2.8'LCD.24 2.4'/2.8'LCD.25 BlueTooth.5 BOOT.1 BOOT.2 C1.1 C8.1 C9.1 C10.1 C11.1 C12.1 C16.2 C17.1 C18.1 C19.1 C20.1 C21.1 C22.1 C24.2 ECG.2 JTAG.1 JTAG.2 MLX90614.3 P1.1 Pulse.2 R2.1 R3.1 R4.1 R9.2 R10.2 R11.1 R13.1 R14.1 R22.1 R27.2 R28.2 U1.19 U1.32 U1.48 U1.64 U3.2 U3.4 VOUT2.2 VOUT2.4 VOUT2.6 | length 445.9
  Top Layer w0.178: P1.1 27.305,82.372 27.635,82.702 C8.1 ; C1.1 C18.1 30.035,138.354 30.023,138.367 R28.2 R27.2 26.568,138.517 26.568,144.17 30.886,148.488 33.782,148.488 ; v1(39.367,126.402) 39.367,128.422 39.81,128.865 U1.48 ; JTAG.2 JTAG.1 ; v1(40.411,88.24) R2.1 41.072,90.119 39.878,91.313 39.878,95.631 40.259,96.012 ; C9.1 C20.1 ; v1(42.671,117.914) 42.671,117.491 U3.2 U3.4 42.671,101.599 ; C10.1 C11.1 C12.1 42.342,95.326 ; Pulse.2 44.577,78.867 C20.1 ; v1(45.475,120.294) U1.64 ; C19.1 C20.1 ; v1(47.879,135.61) U1.32 47.879,134.018 46.99,133.129 46.99,132.588 47.806,131.772 47.806,128.216 48.133,127.889 49.025,127.889 49.863,128.727 51.63,128.727 U1.19 ; 2.4'/2.8'LCD.25 60.401,145.085 60.401,147.015 65.481,152.095 ; C24.2 67.983,121.856 ; BlueTooth.5 67.386,104.699 65.989,104.699 62.484,104.699 61.519,105.664 61.519,109.855 C21.1 C17.1 61.519,112.776 61.519,115.494 58.522,118.491 58.522,119.71 58.572,119.761 R22.1 60.02,124.409 60.96,125.349 C22.1 66.65,125.349 67.335,124.663 ; BOOT.1 65.481,152.095 ; 33.782,148.488 35.611,150.317 37.287,150.317 ; 33.782,148.488 35.458,148.488 37.287,150.317 ; 37.287,150.317 JTAG.1 ; 37.287,150.317 38.506,150.317 39.37,151.181 JTAG.1 ; 40.259,96.012 41.656,96.012 42.342,95.326 ; 40.259,96.012 42.342,98.095 ; 42.342,95.326 42.342,98.095 ; 42.342,98.095 42.671,98.424 42.671,101.599 ; 42.342,98.095 42.342,101.27 42.671,101.599 ; 65.481,152.095 65.481,142.951 67.335,141.097 67.335,134.645 VOUT2.6 67.335,132.563 67.335,124.663 ; 67.335,122.504 67.513,122.504 ; 67.335,122.504 67.335,124.663 ; 67.335,122.504 67.335,122.479 67.958,121.856 67.983,121.856 ; 67.335,124.663 67.488,124.511 67.488,122.53 67.513,122.504 ; 67.513,122.504 67.513,122.326 67.983,121.856
  Bottom Layer w0.178: MLX90614.3 32.512,66.421 33.337,67.246 R9.2 R10.2 31.941,77.98 C16.2 33.553,79.843 33.553,81.483 ; v1(39.367,126.402) 42.671,123.098 ; JTAG.1 40.335,152.4 R3.1 R4.1@42.367,148.964 ; JTAG.2 42.57,158.14 68.936,158.14 BOOT.1 BOOT.2 ; v1(40.411,88.24) 37.516,85.344 31.623,85.344 P1.1 28.575,79.756 30.074,79.756 31.318,81.001 31.318,81.686 31.877,82.245 ; R4.1 R4.1@42.367,148.964 ; v1(42.671,117.914) 42.671,123.098 ; Pulse.2 41.199,82.245 ; v1(45.475,120.294) 42.671,123.098 ; v1(47.879,135.61) 48.792,134.696 56.236,134.696 57.455,135.915 57.455,145.085 2.4'/2.8'LCD.24 59.576,145.91 60.338,145.91 60.792,145.456 60.792,144.694 2.4'/2.8'LCD.25 ; R14.1 R13.1 R11.1 48.311,148.895 48.006,148.59 44.762,148.59 44.243,148.071 43.26,148.071 R4.1@42.367,148.964 ; ECG.2 56.769,81.661 69.088,81.661 70.104,82.677 BlueTooth.5 68.961,103.124 66.65,103.124 66.192,102.667 66.192,95.91 65.38,95.098 57.201,95.098 44.348,82.245 41.199,82.245 ; VOUT2.6 VOUT2.4 VOUT2.2 ; 31.877,82.245 32.995,82.042 33.553,81.483 ; 31.877,82.245 34.315,82.245 ; 33.553,81.483 34.315,82.245 ; 34.315,82.245 41.199,82.245
VCC5: 2.4'/2.8'LCD.28 C14.2 C23.1 C25.2 K1.2 K1.5 U3.3 VOUT3.2 VOUT3.4 VOUT3.6 | length 123.9
  Top Layer w0.178: K1.2 25.845,152.337 C14.2 25.845,141.491 25.756,141.402 25.756,137.889 26.015,137.63 29.375,137.63 31.752,135.253 v1(31.752,134.518) C25.2 28.334,133.794 28.296,133.756 28.296,127.279 40.131,115.444 U3.3 ; v1(59.69,130.137) C23.1 ; 2.4'/2.8'LCD.28 62.738,145.288 62.738,143.358 60.808,141.427 59.461,141.427 58.649,140.614 58.649,135.915 59.69,134.874 C23.1 ; VOUT3.6 61.722,132.08 C23.1
  Bottom Layer w0.178: K1.2 K1.5 ; v1(31.752,134.518) 40.948,134.518 44.453,131.013 44.67,131.013 44.746,130.937 47.959,130.937 48.187,131.166 57.81,131.166 ; VOUT3.6 VOUT3.4 VOUT3.2 ; 57.81,131.166 58.839,130.137 v1(59.69,130.137) 58.661,131.166 57.81,131.166
pads on no net: 2.4'/2.8'LCD. 2.4'/2.8'LCD.32 BAT1.0 BlueTooth.1 BlueTooth.2 BlueTooth.3 BlueTooth.6 ECG.1 ECG.3 ECG.4 JTAG.11 JTAG.17 JTAG.19 K1.1 K1.6 USB_1.4 USB_1.6 USB_1.7 USB_1.8 USB_1.9 USB_1.MH1 USB_1.MH2 Y1. Y2.

## Polygon pours and split planes (outlines as drawn)
no net on Internal Plane 1 (split plane): 74.166,157.777 74.166,65.743 74.084,65.661 25.23,65.661 25.148,65.743 25.148,157.777 25.484,158.113 73.83,158.113
no net on Internal Plane 2 (split plane): 74.166,157.777 74.166,65.743 74.084,65.661 25.23,65.661 25.148,65.743 25.148,157.777 25.484,158.113 73.83,158.113

## Keep-outs
Keep-Out Layer:
  circle w0.262: c28.956,69.469 r1.905
  lines w0.135: 24.638,65.532 25.019,65.151 74.295,65.151 74.676,65.532 74.676,157.988 74.041,158.623 25.273,158.623 24.638,157.988 24.638,65.532
  lines w0.254: 43.18,68.707 46.355,68.707 46.355,74.295 43.18,74.295 43.18,68.707

## Silkscreen, mask and mechanical layers (free items; w line width, h text height)
Top Overlay:
  text "3.3V" at 67.818,157.734 h1 r270
  text "B0" at 67.564,155.067 h1
  text "B1" at 67.945,153.162 h1
  text "GND" at 67.691,152.4 h1 r270
  text "PWR" at 25.273,147.32 h2
  text "3.3V" at 73.152,139.446 h2 r270
  text "GND" at 73.152,135.89 h2 r270
  text "GND" at 73.152,132.207 h2 r270
  text "5V" at 73.152,128.27 h2 r270
  text "PA10" at 13.97,120.142 h1
  text "RXD" at 16.256,120.142 h1
  text "PA9" at 13.97,117.602 h1
  text "TXD" at 15.875,117.602 h1
Bottom Overlay:
  text "By SCNU 夏梦" at 57.912,116.078 h2
  text "2014.11.28" at 56.515,114.3 h2

## Text inside footprints (layer, text, board x,y; h text height)
2.4'/2.8'LCD: Top Overlay "D16" at 53.013,148.118 h0.71; Top Overlay "DB8" at 45.388,141.618 h0.71; Top Overlay "RS" at 30.513,148.118 h0.71; Top Overlay "CS" at 30.513,141.618 h0.71; Top Overlay "WR" at 33.013,141.618 h0.71; Top Overlay "RST" at 35.263,141.618 h0.71; Top Overlay "D2" at 38.013,141.618 h0.71; Top Overlay "D3" at 38.138,148.118 h0.71; Top Overlay "D4" at 40.638,141.618 h0.71; Top Overlay "D5" at 40.638,148.118 h0.71; Top Overlay "D6" at 43.138,141.618 h0.71; Top Overlay "D7" at 43.263,148.118 h0.71; Top Overlay "D10" at 45.388,148.118 h0.71; Top Overlay "D11" at 48.013,141.618 h0.71; Top Overlay "D15" at 53.013,141.618 h0.71; Top Overlay "D14" at 50.513,148.118 h0.71; Top Overlay "D17" at 55.513,141.618 h0.71; Top Overlay "5V" at 63.138,148.118 h0.71; Top Overlay "GND" at 60.513,148.118 h0.71; Top Overlay "3.3" at 58.013,148.118 h0.71; Top Overlay "D12" at 47.888,148.118 h0.71; Top Overlay "D1" at 35.638,148.118 h0.71; Top Overlay "RD" at 33.013,148.118 h0.71; Top Overlay "GND" at 55.513,148.118 h0.71; Top Overlay "GND" at 63.013,141.618 h0.71; Top Overlay "D13" at 50.513,141.618 h0.71; Top Overlay "PEN" at 68.263,141.618 h0.76; Top Overlay "CLK" at 70.638,148.118 h0.76; Top Overlay "MOSI" at 65.388,148.118 h0.76; Top Overlay "MO" at 68.638,148.118 h0.76; Top Overlay "TCS" at 70.638,141.618 h0.76; Top Overlay "MISO" at 65.263,141.618 h0.76; Top Overlay "BL" at 58.513,141.618 h0.71; Top Overlay "3.3" at 60.513,141.618 h0.71
U3: Top Overlay "3" at 40.792,109.526 h1.27 r180; Top Overlay "1" at 45.364,109.526 h1.27 r180